# Altium PCB ch55x.PcbDoc
Units mil, origin at the board's own origin, x right, y up, seen from the top; angles counter-clockwise.
Board outline 2255.87 x 774.58 mil, 2 copper layers (Top Layer, Bottom Layer); 11 components, 19 nets, 49 pads, 17 vias.
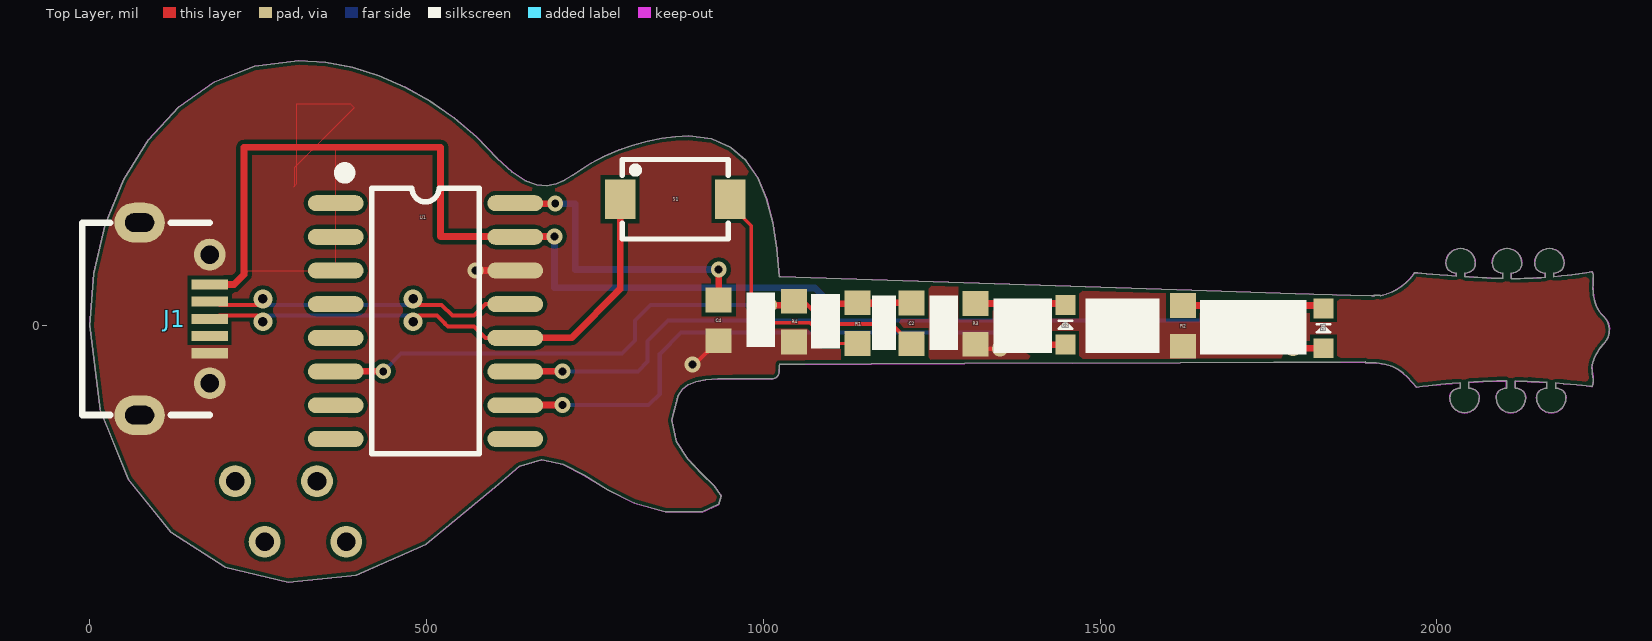
[diagram p0: Top Layer view]
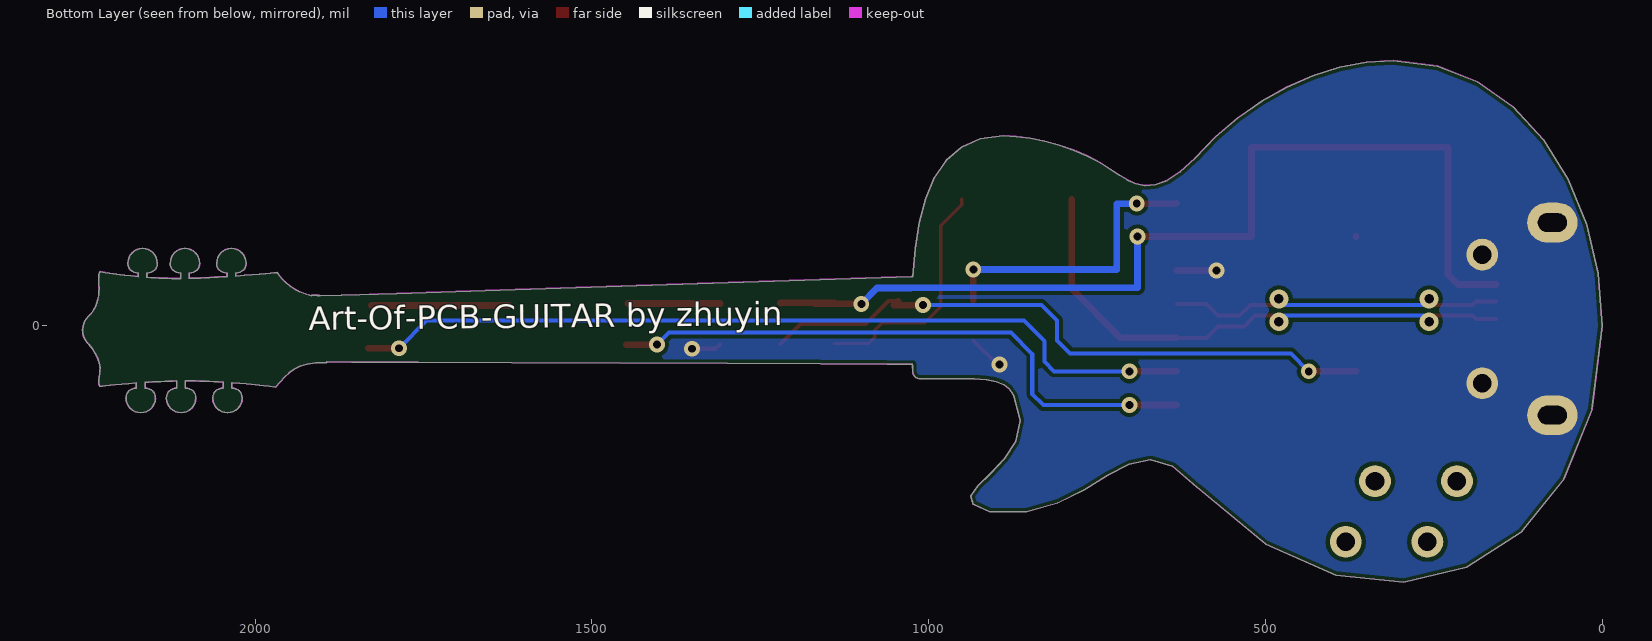
[diagram p1: Bottom Layer view, seen from below]
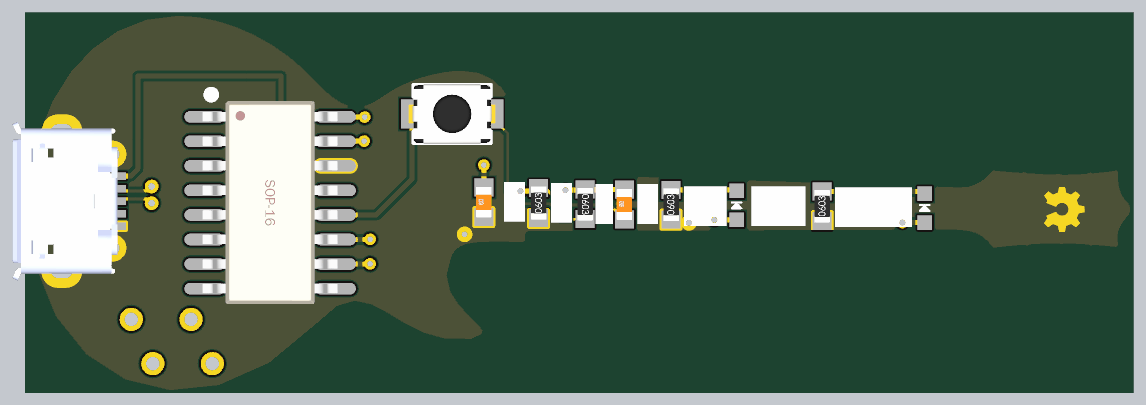
[diagram p2: 3D render of the assembled board from above, using the file's embedded part models]

## Layer stack, top to bottom
Top Solder: solder mask 0.4, Solder Resist, Dk 3.5
Top Layer: signal copper 1.4
Dielectric1: dielectric 12.6, FR-4, Dk 4.8
Bottom Layer: signal copper 1.4
Bottom Solder: solder mask 0.4, Solder Resist, Dk 3.5

## Board outline
920 vertices, not listed, extent 0.27,-380.93 2256.13,393.65

## Design rules (kind name [scope] priority, off if disabled: settings)
Clearance [All] p1: gap=6 ignorepadtopadclearanceinfootprint=FALSE except(0: Arc-Hole Track-Hole SMDPad-Hole THPad-Hole Via-Hole Fill-Hole Poly-Hole Region-Hole Text-Hole)
ComponentClearance [All] p1 off: gap=10 collisioncheckmode=3 verticalgap=10 showdistances=FALSE
DiffPairsRouting [All] p1: maxlimit=10 minlimit=10 mostfreqgap=10 toplayer_minwidth=6 toplayer_maxwidth=15 toplayer_prefwidth=15 bottomlayer_minwidth=6 bottomlayer_maxwidth=15 bottomlayer_prefwidth=15 maxuncoupledlength=500
PolygonConnect [All] p1: connectstyle=Direct reliefconductorwidth=10 reliefentries=4 polygonreliefangle="90 Angle" airgapwidth=10
RoutingVias [All] p1: holewidth=14 width=28 viastyle="Through Hole" minholewidth=14 minwidth=28 maxholewidth=14 maxwidth=28
SolderMaskExpansion [All] p1: expansion=4
Width [All] p1: maxlimit=100 minlimit=5 preferedwidth=10 minimp=50.000000 maximp=50.000000 favimp=50.000000
28 further rules are at their usual default settings.

## Classes and differential pairs
differential pair USB: +USB_P -USB_N

## Components (designator, comment, footprint, x,y, rotation, side; value= is the part's Value field where it differs from the comment)
C2 "C0603" 0603_C 1220,3.3 r90 top value=0.1uF
C4 "C0603" 0603_C 933.72,7.84 r90 top value=2.2uF
D1 "GREEN" 0603_LED 1831.62,-3.96 r90 top
D2 "RED" 0603_LED 1448.52,1.44 r90 top
J1 "Micro USB B" MICRO_USB 125.98,10.14 r90 top
R1 "R0603" 0603_R 1140,3.8 r270 top value=1K
R2 "R0603" 0603_R 1622.92,-0.26 r90 top value=1K
R3 "R0603" 0603_R 1315,2.74 r90 top value=1K
R4 "R0603" 0603_R 1045.32,6.14 r90 top value=100K
S1 "SW-PB" SMT_SW_PTS_820 869.12,187.74 r0 top
U1 "CH551G" SOP16N_M 498.42,6.94 r0 top locked

## Footprints (in the part's own frame and the unit in brackets; to place one, negate y for a bottom-side part, rotate by r counter-clockwise, add the part's x,y. Pads: shape width x height; smd on the part's side, far side on the other; paste and mask are expansions set on the pad)
0603_C [mm]
  rect 0.93x0.98 smd: 1(-0.77,0) 2(0.77,0)
  body extent -0.8,-0.4 0.8,0.4, height 0.3
0603_LED [mm]
  rect 0.75x0.75 smd: 1(-0.75,0) 2(0.75,0)
  silkscreen extent -0.15,-0.25 0.15,0.25
0603_R [mm]
  rect 0.93x0.98 smd: 1(-0.77,0) 2(0.77,0)
  body extent -0.85,-0.4 0.85,0.4, height 0.56
MICRO_USB [mil]
  rect 15x54 smd: 1(51,-52) 2(25.5,-52) 3(0,-52) 4(-25.5,-52) 5(-51,-52)
  oval 59.06x74.8 hole 27.56 slot 43.31 at 90 deg: 6(-143,52) 7(143,52)
  round 47.24 hole 27.5: 8(95.5,-52) 9(-95.5,-52)
  silkscreen extent -143,-52 143,137, body extent -161,-61 161,152, height 105
SMT_SW_PTS_820 [mm] "SMT Tactile ?Switch PTS 820 Series"
  rect 1.143x1.5 smd: 1(-2.075,0) 2(2.075,0)
  round 0 all layers, no hole paste-2.54 mask-2.54: MH1(0,0.9) MH2(0,-0.9)
  silkscreen extent -2,-1.5 2,1.5, body extent -2.25,-1.55 2.25,1.55, height 2.05
SOP16N_M [mm] "10.3*7*1.8mm（长宽高）"
  oval 2.1x0.6 smd: 1(-3.383,4.445) 2(-3.383,3.175) 3(-3.383,1.905) 4(-3.383,0.635) 5(-3.383,-0.635) 6(-3.383,-1.905) 7(-3.383,-3.175) 8(-3.383,-4.445) 9(3.383,-4.445) 10(3.383,-3.175) 11(3.383,-1.905) 12(3.383,-0.635) 13(3.383,0.635) 14(3.383,1.905) 15(3.383,3.175) 16(3.383,4.445)
  silkscreen extent -3.2,-5 2.03,5.74, body extent -3.5,-5.25 3.5,5.25, height 1.9

## Part data
C2 C4: "Capacitor", LatestRevisionDate=17-Jul-2002, LatestRevisionNote="Re-released for DXP Platform.", PackageDescription="Radial Cap, Thru-Hole; 2 Leads; 0.3 in Pin Spacing", PackageReference=RAD-0.3, Published=8-Jun-2000, Publisher="Altium Limited"
D1 D2: library part D0603, "Typical RED, GREEN, YELLOW, AMBER GaAs LED", LatestRevisionDate=17-Jul-2002, LatestRevisionNote="Re-released for DXP Platform.", PackageDescription="SM LED; 2 Flat Leads", PackageReference=3.2X1.6X1.1, PackageVersion=Feb-2002, Published=8-Jun-2000, Publisher="Altium Limited"
R1 R2 R3 R4: "Resistor", LatestRevisionDate=17-Jul-2002, LatestRevisionNote="Re-released for DXP Platform.", PackageDescription="Axial Device, Thru-Hole; 2 Leads; 0.3 in Pin Spacing", PackageReference=AXIAL-0.3, Published=8-Jun-2000, Publisher="Altium Limited"
S1: "Switch", LatestRevisionDate=17-Jul-2002, LatestRevisionNote="Re-released for DXP Platform.", PackageDescription="Switch; 2 Leads", PackageReference=SPST-2, Published=24-Mar-1999, Publisher="Altium Limited"

## Free pads (board coordinates)
  round 47.24 hole 27.5: 2(215.62,-230.76) 2(259.52,-320.86) 2(337.32,-230.76) 2(380.72,-320.86)

## Via types
v1: diameter 23.62, hole 11.81, Top Layer to Bottom Layer, 13 vias
v2: diameter 28, hole 14, Top Layer to Bottom Layer, 4 vias

## Nets (pads, with @x,y where several pads share a name; then routed paths per layer and width w, separated by ;. In a path a pad name is that pad's centre, name@x,y a point inside that pad or via, vN(x,y) a via of type N, cw(c..) or ccw(c..) an arc to the next point about the centre after c; other vN are vias at no path point)
3V3: C4.2 U1.16 | length 445.3
  Top Layer w10: U1.16 632.31,181.24 v1(691.02,181.24) ; C4.2 v1(933.72,83.44)
  Bottom Layer w10: v1(691.02,181.24) 720.62,181.24 720.62,83.74 720.92,83.44 v1(933.72,83.44)
5V_USB: C2.2 J1.1 R1.1 U1.15 | length 1506.8
  Top Layer w10: J1.1@157.62,61.14 214.32,61.14 229.02,75.84 229.02,264.94 520.72,264.94 520.72,132.44 v1(689.82,132.44) ; v1(1100,32.5) 1168.66,32.5 1170.02,33.86 ; R1.1 1219.5,34.11 C2.2
  Bottom Layer w10: v1(689.82,132.44) 689.82,56.34 1026.22,56.34 1026.58,55.98 1076.52,55.98 v1(1100,32.5)
GND: C4.1 J1.5 J1.6 J1.7 J1.8 J1.9 R2.1 R3.1 R4.1 U1.14 | length 156.7
  Top Layer w6: v1(894.6,-57.5) 898.1,-57.5 933.13,-22.47 C4.1 ; R3.1@1309.92,-27.57 1316.55,-34.2 v1(1351.5,-34.2)
  Top Layer w10: v1(572.9,81.94) U1.14
NetC2_1: C2.1 R4.2 U1.6 | length 952.9
  Top Layer w6: R4.2 1059.54,36.46 1093.4,2.6 1190.38,2.6 C2.1
  Top Layer w10: U1.6@365.63,-67.66 v1(435.72,-67.66) ; v1(1008.3,30.5) 1051.28,30.5 R4.2
  Bottom Layer w6: v1(435.72,-67.66) 462.22,-41.16 790.02,-41.16 809.47,-21.71 809.47,7.59 832.38,30.5 v1(1008.3,30.5)
NetD1_2: D1.2 R2.2 | length 204.2
  Top Layer w10: R2.2 D1.2@1827.13,30.06
NetD2_2: D2.2 R3.2 | length 136.5
  Top Layer w10: R3.2@1309.92,33.06 D2.2@1446.43,33.06
NetR1_2: R1.2 S1.2 | length 359.2
  Top Layer w5: S1.2 950.81,179.65 982,148.47 982,28.08 1005.58,4.5 1068.7,4.5 1080,-6.8 1080,-17.1 1089.42,-26.52 R1.2
P1.1: U1.9
P1.4: U1.2 | length 0.6
  Top Layer w10: U1.2 U1.2@365.63,132.34
P1.5: U1.3
P1.6: U1.4
P1.7: U1.5
P3.0: U1.8
P3.1: U1.7
P3.2: U1.1
P3.3: D2.1 U1.10 | length 903.4
  Top Layer w10: U1.10@632.01,-117.66 v1(702.1,-117.66) ; v1(1403.24,-28.08) D2.1
  Bottom Layer w6: v1(702.1,-117.66) 829.82,-117.66 846.22,-101.26 846.22,-41.68 877.82,-10.09 1385.24,-10.09 v1(1403.24,-28.08)
P3.4: D1.1 U1.11 | length 1265.4
  Top Layer w10: U1.11@632.01,-67.66 v1(702.1,-67.66) ; v1(1786.34,-33.48) D1.1
  Bottom Layer w6: v1(702.1,-67.66) 813.92,-67.66 828.22,-53.36 828.22,-23.06 858.68,7.4 1091.31,7.4 1745.45,7.4 v1(1786.34,-33.48)
USB_N: J1.2 U1.13 | length 504.5
  Top Layer w6: J1.2@157.62,35.64 187.62,35.64 192.37,30.89 248.02,30.89 v2(257.02,39.89) ; v2(479.92,39.89) 488.92,30.89 522.35,30.89 538.3,14.94 570.27,14.94 587.27,31.94 U1.13
  Bottom Layer w6: v2(257.02,39.89) 266.02,30.89 470.92,30.89 v2(479.92,39.89)
USB_P: J1.3 S1.1 U1.12 | length 823.3
  Top Layer w6: J1.3@157.62,10.14 187.62,10.14 192.37,14.89 248.02,14.89 v2(257.02,5.89) ; v2(479.92,5.89) 488.92,14.89 515.72,14.89 526.67,3.94 ; 526.99,3.63 531.67,-1.06 570.27,-1.06 587.27,-18.06 U1.12
  Top Layer w10: U1.12 715.02,-18.06 787.43,54.35 S1.1
  Bottom Layer w6: v2(257.02,5.89) 266.02,14.89 470.92,14.89 v2(479.92,5.89)
pads on no net: J1.4 S1.MH1 S1.MH2

## Polygon pours and split planes (outlines as drawn)
GND on Top Layer "GND_L01_P014" (solid, remove dead copper, pour order 14): 303,206.6 307.3,210.9 307.3,329.7 386.8,329.7 392.8,323.7 303.3,234.2 303.3,206.6
GND on Top Layer "GND_L01_P008" (solid, remove dead copper, pour order 8): -359.3,561.2 -347.7,573.2 2445.15,573.2 2445.15,365.17 2445.15,91.47 2449.05,-453.5 2288.4,-453.5 -359.3,-453.5 -359.3,6.7
GND on Top Layer "GND_L01_P010" (solid, remove dead copper, pour order 10): 198.3,299.6 198.3,48.2 608.9,-362.4 492.4,-478.9 -47.6,-478.9 -47.6,53.1 198.9,299.6
GND on Top Layer "GND_L01_P012" (solid, remove dead copper, pour order 12): 229.02,264.94 229.02,75.84 235.12,81.94 365.23,81.94 365.23,262.97 364,264.2 364.5,264.7 365.5,264.7
GND on Bottom Layer "GND_L02_P016" (solid, remove dead copper, pour order 16): -319.2,463.3 -307.6,475.3 2485.25,475.3 2485.25,267.27 2485.25,-6.43 2489.15,-551.4 2328.5,-551.4 -319.2,-551.4 -319.2,-91.2

## Keep-outs
Keep-Out Layer:
  lines w0.5: 604.71,248.66 604.71,248.66 ; 604.7,248.66 604.71,248.66 ; 604.7,248.66 574.38,280.3 541.19,308.67 505.65,333.49 468.26,354.46 429.53,371.28 389.98,383.66 350.11,391.3 310.42,393.91 244.68,385.64 184.92,362.02 132,324.89 86.77,276.04 50.1,217.32 22.84,150.52 5.85,77.48 0,0 14.94,-124.29 56.59,-227.49 120.22,-306.66 201.09,-358.87 294.45,-381.2 395.57,-370.71 499.71,-324.48 602.13,-239.56 602.09,-239.51 638.12,-208.64 670.78,-199.31 702.1,-205.82 734.1,-222.48 768.8,-243.59 808.23,-263.45 854.39,-276.37 909.32,-276.64 933.73,-265.52 937.68,-252.74 927.27,-237.63 908.62,-219.51 887.84,-197.71 871.05,-171.58 864.35,-140.43 873.86,-103.6 880.13,-94.28 888.61,-87.6 899.79,-83.15 914.14,-80.48 932.11,-79.18 954.2,-78.82 980.86,-78.96 1012.56,-79.19 1014.75,-78.98 1016.81,-78.37 1018.68,-77.4 1020.32,-76.1 1021.7,-74.52 1022.76,-72.7 1023.47,-70.68 1023.79,-68.5 1023.85,-67.12 1023.9,-65.74 1023.96,-64.35 1024.02,-62.97 1024.07,-61.59 1024.13,-60.21 1024.19,-58.83 1024.25,-57.45 1061.61,-57.31 1160.1,-56.92 1299.34,-56.37 1458.96,-55.74 1618.58,-55.11 1757.82,-54.56 1856.31,-54.18 1893.67,-54.03 1893.67,-55.02 1909.76,-55.51 1922.84,-57.39 1933.46,-60.54 1942.19,-64.86 1949.59,-70.22 1956.22,-76.51 1962.64,-83.63 1969.4,-91.45 1979.17,-90.25 1986.94,-89.31 1993.48,-88.57 1999.54,-87.94 2005.91,-87.35 2013.32,-86.73 2022.55,-86 2034.35,-85.09 2034.35,-92.36 2031.13,-92.93 2028.17,-93.8 2025.54,-95.01 2023.28,-96.58 2021.44,-98.57 2020.06,-101 2019.2,-103.91 2018.91,-107.35 2019.36,-111.79 2020.64,-115.93 2022.67,-119.68 2025.37,-122.94 2028.63,-125.64 2032.38,-127.67 2036.52,-128.96 2040.97,-129.4 2045.42,-128.95 2049.56,-127.67 2053.31,-125.63 2056.57,-122.94 2059.27,-119.67 2061.3,-115.93 2062.59,-111.79 2063.04,-107.35 2062.74,-103.91 2061.88,-101 2060.5,-98.57 2058.66,-96.58 2056.4,-95.01 2053.77,-93.8 2050.82,-92.93 2047.59,-92.36 2047.59,-84.14 2054.51,-83.7 2061.47,-83.3 2068.44,-82.95 2075.4,-82.65 2082.3,-82.41 2089.11,-82.23 2095.8,-82.13 2102.33,-82.12 2102.44,-82.12 2102.55,-82.12 2102.67,-82.12 2102.78,-82.12 2102.89,-82.12 2103,-82.12 2103.11,-82.13 2103.22,-82.13 2103.22,-92.36 2100,-92.93 2097.05,-93.8 2094.42,-95.01 2092.17,-96.59 2090.33,-98.57 2088.96,-101 2088.1,-103.92 2087.8,-107.35 2088.25,-111.79 2089.53,-115.93 2091.56,-119.67 2094.26,-122.94 2097.52,-125.63 2101.26,-127.67 2105.41,-128.95 2109.86,-129.4 2114.3,-128.96 2118.44,-127.67 2122.18,-125.64 2125.45,-122.94 2128.14,-119.68 2130.17,-115.93 2131.46,-111.79 2131.91,-107.35 2131.61,-103.92 2130.75,-101 2129.37,-98.57 2127.53,-96.59 2125.28,-95.01 2122.65,-93.8 2119.7,-92.93 2116.47,-92.36 2116.48,-82.31 2122.49,-82.46 2128.48,-82.64 2134.43,-82.86 2140.33,-83.11 2146.16,-83.39 2151.92,-83.7 2157.59,-84.03 2163.15,-84.38 2163.15,-92.36 2159.93,-92.93 2156.98,-93.8 2154.35,-95.01 2152.09,-96.59 2150.25,-98.58 2148.88,-101.01 2148.02,-103.92 2147.73,-107.35 2148.17,-111.79 2149.46,-115.93 2151.49,-119.67 2154.19,-122.94 2157.45,-125.63 2161.2,-127.67 2165.34,-128.95 2169.78,-129.39 2174.22,-128.95 2178.36,-127.66 2182.11,-125.63 2185.38,-122.93 2188.07,-119.67 2190.11,-115.92 2191.4,-111.77 2191.84,-107.33 2191.55,-103.9 2190.69,-100.99 2189.31,-98.57 2187.47,-96.58 2185.21,-95.01 2182.58,-93.8 2179.62,-92.93 2176.4,-92.36 2176.4,-85.3 2187.75,-86.19 2198.13,-87.08 2207.38,-87.94 2215.32,-88.73 2221.79,-89.41 2226.62,-89.94 2229.64,-90.29 2230.69,-90.41 2231.96,-87.57 2232.4,-84.12 2232.25,-80.18 2231.75,-75.91 2231.12,-71.44 2230.61,-66.92 2230.45,-62.48 2230.87,-58.27 2232.23,-52.98 2234.08,-47.97 2236.29,-43.27 2238.75,-38.92 2241.35,-34.96 2243.98,-31.42 2246.51,-28.34 2248.83,-25.76 2252.35,-21.15 2254.76,-16.12 2256.1,-10.83 2256.4,-5.44 2255.69,-0.13 2254.01,4.94 2251.37,9.6 2247.82,13.68 2245.42,16.07 2243.09,18.77 2240.88,21.83 2238.81,25.31 2236.92,29.26 2235.25,33.73 2233.84,38.8 2232.72,44.51 2232.13,50.2 2231.98,55.93 2232.1,61.51 2232.3,66.75 2232.38,71.46 2232.16,75.46 2231.45,78.56 2230.06,80.58 2222.38,79.12 2216.2,77.99 2210.86,77.09 2205.7,76.34 2200.06,75.65 2193.28,74.94 2184.7,74.11 2173.65,73.08 2173.65,77.94 2176.87,78.51 2179.82,79.39 2182.45,80.59 2184.71,82.17 2186.55,84.16 2187.92,86.58 2188.78,89.49 2189.08,92.92 2188.63,97.36 2187.35,101.51 2185.31,105.25 2182.61,108.52 2179.35,111.21 2175.6,113.24 2171.46,114.53 2167.02,114.98 2162.57,114.53 2158.43,113.24 2154.69,111.21 2151.42,108.52 2148.73,105.25 2146.7,101.51 2145.41,97.36 2144.97,92.92 2145.26,89.5 2146.12,86.59 2147.49,84.16 2149.33,82.18 2151.59,80.6 2154.21,79.39 2157.16,78.52 2160.39,77.94 2160.39,71.97 2154.58,71.56 2148.63,71.2 2142.57,70.88 2136.38,70.61 2130.09,70.39 2123.71,70.24 2117.25,70.16 2110.72,70.14 2110.72,77.94 2113.94,78.51 2116.9,79.39 2119.53,80.6 2121.79,82.17 2123.63,84.16 2125.01,86.59 2125.87,89.49 2126.17,92.92 2125.72,97.36 2124.43,101.51 2122.39,105.25 2119.7,108.52 2116.43,111.21 2112.68,113.24 2108.54,114.53 2104.1,114.98 2099.66,114.53 2095.52,113.24 2091.77,111.21 2088.51,108.52 2085.81,105.25 2083.77,101.51 2082.48,97.37 2082.02,92.92 2082.32,89.5 2083.18,86.59 2084.56,84.16 2086.41,82.17 2088.67,80.59 2091.3,79.39 2094.26,78.51 2097.48,77.93 2097.48,70.35 2097.05,70.36 2096.63,70.37 2096.2,70.38 2095.77,70.39 2095.34,70.4 2094.92,70.41 2094.49,70.42 2094.06,70.43 2087.37,70.68 2080.7,70.96 2074.05,71.27 2067.45,71.6 2060.9,71.95 2054.44,72.31 2048.07,72.69 2041.8,73.08 2041.8,77.94 2045.03,78.52 2047.98,79.39 2050.6,80.6 2052.86,82.18 2054.7,84.16 2056.08,86.59 2056.94,89.49 2057.24,92.92 2056.79,97.36 2055.5,101.51 2053.46,105.25 2050.77,108.52 2047.5,111.21 2043.76,113.24 2039.62,114.52 2035.18,114.97 2030.74,114.52 2026.59,113.24 2022.84,111.21 2019.58,108.51 2016.89,105.25 2014.85,101.5 2013.57,97.36 2013.12,92.92 2013.42,89.49 2014.28,86.58 2015.65,84.15 2017.49,82.17 2019.74,80.59 2022.37,79.38 2025.32,78.51 2028.54,77.94 2028.54,73.97 2015.75,74.89 2004.01,75.8 1993.52,76.65 1984.49,77.43 1977.11,78.08 1971.6,78.59 1968.14,78.92 1966.94,79.04 1963.48,73.92 1959.15,68.81 1953.96,63.81 1947.96,59.04 1941.17,54.63 1933.61,50.69 1925.33,47.35 1916.35,44.73 1916.35,45.48 1904.07,45.14 1907.07,44.56 1903.56,44.4 1871.74,45.33 1789.82,48.02 1635.99,53.11 1388.46,61.28 1025.44,73.18 1025.44,73.28 1023.74,73.28 1020.19,114.59 1014.06,153.41 1004.75,188.82 991.65,219.87 974.14,245.65 951.63,265.21 923.49,277.63 889.12,281.97 869.61,281.08 848.94,278.46 827.57,274.16 805.99,268.28 784.66,260.87 764.06,252.01 744.67,241.77 726.95,230.23 716.12,223.26 704.72,216.44 692.4,211.03 678.81,208.27 663.6,209.41 646.41,215.69 626.91,228.36 604.74,248.66 ; 604.74,248.67 604.74,248.66 ; 604.73,248.67 604.74,248.67 ; 604.73,248.67 604.73,248.67 ; 604.72,248.67 604.73,248.67 ; 604.71,248.66 604.72,248.67 ; 604.71,248.66 604.71,248.66

## Silkscreen, mask and mechanical layers (free items; w line width, h text height)
Top Overlay:
  rectangle: 975.1,-31.8 1017.6,49.1
  rectangle: 1071,-33.9 1113.5,47
  rectangle: 1161.5,-36 1197.3,44.9
  rectangle: 1246.4,-36 1288.9,44.9
  rectangle: 1341.4,-40.5 1428.4,40.4
  rectangle: 1648.6,-42.7 1806.3,38.2
  rectangle: 1478.5,-40.5 1588.5,40.4
Bottom Overlay:
  text "Art-Of-PCB-GUITAR by zhuyin" at 1920.4,-18.9 h60 r359.4
Top Solder:
  region: 2157.07,-12.56 2156.73,-12.7 2156.73,-12.69 2145.76,-14.79 2145.42,-14.93 2145.32,-15.16 2141.52,-24.35 2141.42,-24.58 2141.56,-24.91 2141.57,-24.91 2147.85,-34.16 2147.99,-34.49 2147.8,-34.95 2147.76,-34.91 2139.89,-42.85 2139.44,-43.04 2139.1,-42.9 2139.11,-42.89 2129.86,-36.62 2129.52,-36.48 2129.3,-36.57 2120.11,-40.38 2119.88,-40.47 2119.74,-40.81 2119.75,-40.81 2117.65,-51.79 2117.51,-52.12 2117.06,-52.31 2117.06,-52.26 2105.87,-52.31 2105.42,-52.12 2105.28,-51.79 2105.29,-51.78 2103.19,-40.81 2103.05,-40.47 2102.82,-40.38 2093.63,-36.57 2093.41,-36.48 2093.07,-36.62 2093.08,-36.63 2083.83,-42.9 2083.49,-43.04 2083.04,-42.85 2083.07,-42.82 2075.13,-34.95 2074.94,-34.49 2075.08,-34.16 2075.09,-34.16 2081.36,-24.91 2081.5,-24.58 2081.41,-24.35 2079.67,-20.14 2079.57,-19.92 2079.76,-19.46 2079.99,-19.37 2098.97,-11.62 2099.19,-11.53 2099.64,-11.72 2099.73,-11.92 2099.58,-11.99 2102.15,-15.84 2106.42,-18.69 2111.46,-19.7 2116.51,-18.69 2120.78,-15.84 2123.64,-11.56 2124.64,-6.52 2123.64,-1.48 2120.78,2.8 2116.51,5.65 2111.46,6.66 2106.42,5.65 2102.15,2.8 2099.58,-1.05 2099.73,-1.12 2099.64,-1.32 2099.19,-1.51 2098.97,-1.42 2079.99,6.33 2079.76,6.43 2079.57,6.88 2079.67,7.1 2081.41,11.31 2081.5,11.54 2081.36,11.88 2081.35,11.87 2075.08,21.12 2074.94,21.46 2075.13,21.91 2075.16,21.87 2083.04,29.82 2083.49,30 2083.83,29.86 2083.82,29.85 2093.07,23.58 2093.41,23.44 2093.63,23.53 2102.82,27.34 2103.05,27.43 2103.19,27.77 2103.18,27.78 2105.28,38.75 2105.42,39.09 2105.87,39.27 2105.87,39.23 2117.06,39.27 2117.51,39.09 2117.65,38.75 2117.64,38.75 2119.74,27.77 2119.88,27.43 2120.11,27.34 2129.3,23.53 2129.52,23.44 2129.86,23.58 2129.85,23.59 2139.1,29.86 2139.44,30 2139.89,29.82 2139.86,29.78 2147.8,21.91 2147.99,21.46 2147.85,21.12 2147.84,21.12 2141.56,11.88 2141.42,11.54 2141.52,11.31 2145.32,2.12 2145.42,1.9 2145.76,1.76 2145.76,1.77 2156.73,-0.34 2157.07,-0.48 2157.26,-0.93 2157.21,-0.93 2157.26,-12.11